# EAGLE board Quad_ESC_adapter (EAGLE 9.6.2)
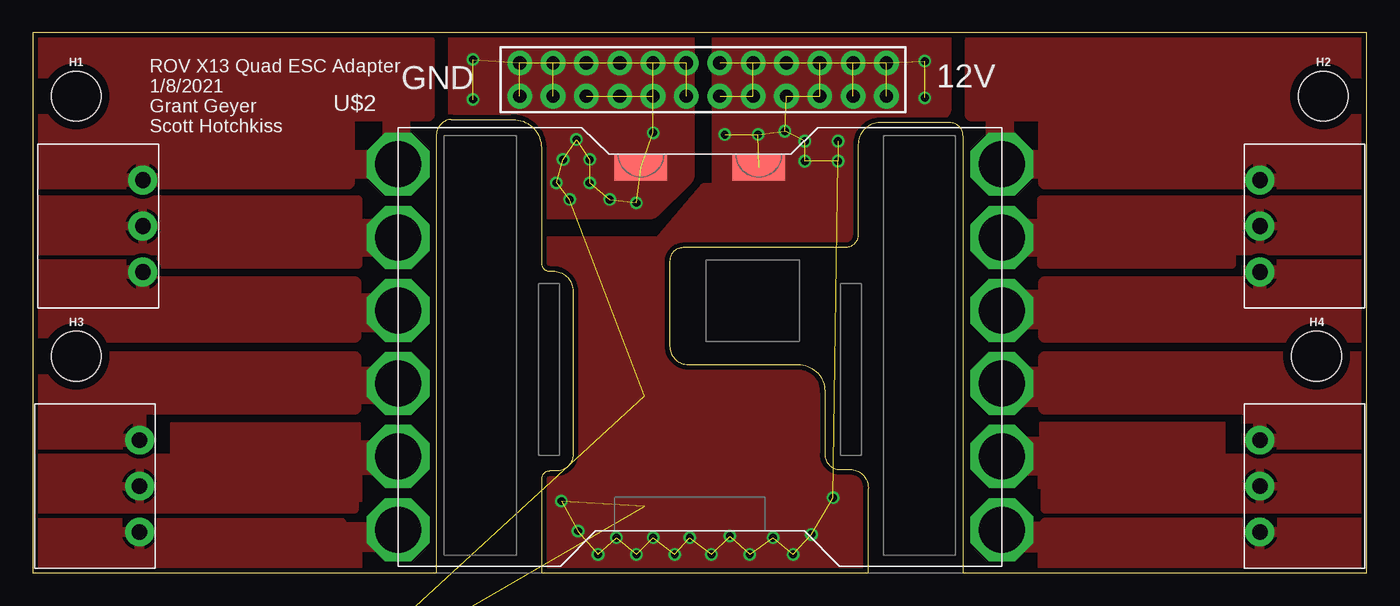
[diagram p0: board, top side]
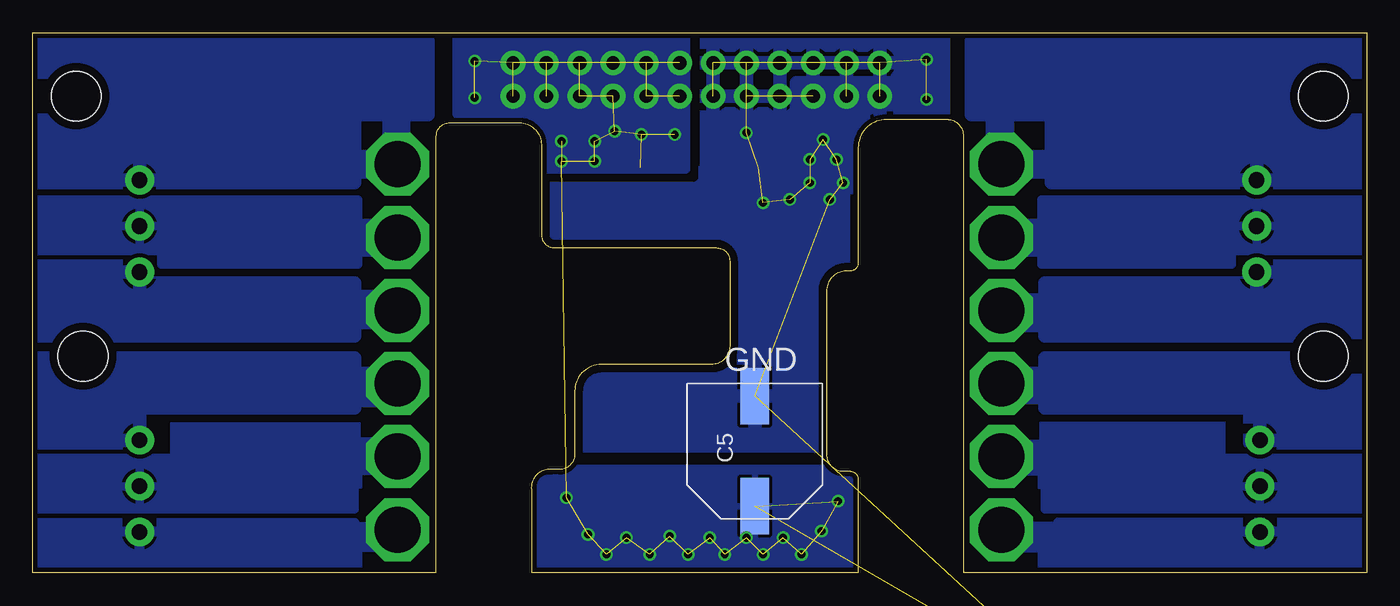
[diagram p1: board, bottom side, seen from below]

Size 101.6 x 41.15 mm. Coordinates in mm from the lower left corner, seen from the top.
Outline: 0,0 30.73,0 30.73,33.27 arc-90 31.88,34.54 36.58,34.54 arc-90 38.73,32.38 38.73,23.62 arc90 39.37,22.99 39.62,22.99 arc-90 41.15,21.46 41.15,9.02 arc-90 39.88,7.75 39.37,7.75 arc90 38.73,7.11 38.73,0 63.63,0 63.63,6.35 arc100 62.1,7.87 61.47,7.87 arc-90 60.33,9.02 60.33,13.84 arc90 58.29,15.88 49.91,15.88 arc-90 48.51,17.27 48.51,23.75 arc-90 49.53,24.77 61.85,24.77 arc90 62.87,25.78 62.87,32.64 arc-90 64.52,34.29 69.85,34.29 arc-90 70.87,33.27 70.87,0 101.6,0 101.6,41.15 0,41.15 0,0
Copper layers (1*16): Top 0.0356mm / dielectric 1.5011mm / Bottom 0.0356mm
Design rules "ECE_Senior_Design *": minimum track width 8mil, minimum drill 13mil, track to track 8mil, track to pad 8mil, pad to pad 6mil, via to via 8mil, smd to smd 6mil, copper to edge 15mil, drill to drill 8mil, minimum pad ring 7mil, minimum via ring 7mil, stop-mask expansion 3mil, vias tented up to drill 30mil, thermal gap 10mil

## Footprints (pad centres in the part's own frame; a part is rotated, then mirrored left to right if it is on the bottom)
CAPAE1030X1050N = smd 4.3 x 2.15: + -4.2,0; - 4.2,0
6-32-HOLE = hole 3.81: 0,0
284512-3 = drill 1.2 pad 2.2: 1 0,3.5; 2 0,0; 3 0,-3.5
BACKPLANE_ESC_ADAPTER_ESC_PWR = drill 1.016 pad 1.88: 12V@1 65.024,36.322; 12V@2 65.024,38.862; 12V@3 62.484,36.322; 12V@4 62.484,38.862; 12V@5 59.944,36.322; 12V@6 59.944,38.862; 12V@7 57.404,36.322; 12V@8 57.404,38.862; 12V@9 54.864,36.322; 12V@10 54.864,38.862; 12V@11 52.324,36.322; 12V@12 52.324,38.862; GND@1 49.784,38.862; GND@2 49.784,36.322; GND@3 47.244,38.862; GND@4 47.244,36.322; GND@5 44.704,38.862; GND@6 44.704,36.322; GND@7 42.164,38.862; GND@8 42.164,36.322; GND@9 39.624,38.862; GND@10 39.624,36.322; GND@11 37.084,38.862; GND@12 37.084,36.322
LUMENIER_QUAD-NO-CUT = drill 3.5 pad 4.8 octagon: 1 0,30.62; 2 0,25.05; 3 0,19.48; 4 0,13.92; 5 0,8.35; 6 0,2.78; 7 46,2.78; 8 46,8.35; 9 46,13.92; 10 46,19.48; 11 46,25.05; 12 46,30.62 | smd 4 x 2: GND 18.51,30.37; VIN 27.49,30.37

## Placement (x,y rotation side)
C1  330uF  [CAPAE1030X1050N]  3.3,-33.78 0 top  (outside the outline)
C5  330uF  [CAPAE1030X1050N]  46.61,9.27 90 bottom
C6  330uF  [CAPAE1030X1050N]  3.3,-22.48 0 top  (outside the outline)
H1  6-32-HOLE  [6-32-HOLE]  3.3,36.32 0 top
H2  6-32-HOLE  [6-32-HOLE]  98.3,36.32 0 top
H3  6-32-HOLE  [6-32-HOLE]  3.3,16.51 0 top
H4  6-32-HOLE  [6-32-HOLE]  97.79,16.51 0 top
J1  284512-3  [284512-3]  8.38,26.42 180 top
J2  284512-3  [284512-3]  8.13,6.6 180 top
J3  284512-3  [284512-3]  93.47,26.42 0 top
J4  284512-3  [284512-3]  93.47,6.6 0 top
U$2  BACKPLANE_ESC_ADAPTER_PWRESC  [BACKPLANE_ESC_ADAPTER_ESC_PWR]  0,0 0 top
U$10  LUMENIER_QUAD-NO-CUT  [LUMENIER_QUAD-NO-CUT]  27.81,0.51 0 top

## Library data of the parts
C1 C5 C6 = CAP, aluminin-capacitor-brick-UCM1H331MNL1GS; ARROW_PART_NUMBER: UCM1H331MNL1GS; ARROW_PRICE-STOCK: https://www.arrow.com/en/products/ucm1h331mnl1gs/nichicon; DESCRIPTION: Nichicon 330uF 50 V Aluminium Electrolytic Capacitor SMD, CM Series 2000h 10 (Dia.) x 10mm; HEIGHT: 10.5mm; MANUFACTURER_NAME: Nichicon; MANUFACTURER_PART_NUMBER: UCM1H331MNL1GS; MOUSER_PART_NUMBER: 647-UCM1H331MNL1GS; MOUSER_PRICE-STOCK: https://www.mouser.co.uk/ProductDetail/Nichicon/UCM1H331MNL1GS?qs=DSgADHjnLTkTovFLdbC%252BNg%3D%3D
H1-H4 = Mounting Holes
J1-J4 = ThrusterConnector
U$2 = Backplane_ESC_adapter
U$10 = Lumenier ESC

## Nets
12V: C1.+ C5.+ C6.+ U$2.12V@1 U$2.12V@2 U$2.12V@3 U$2.12V@4 U$2.12V@5 U$2.12V@6 U$2.12V@7 U$2.12V@8 U$2.12V@9 U$2.12V@10 U$2.12V@11 U$2.12V@12 U$10.VIN
ESC1_B: J1.3 U$10.1
ESC1_R: J1.1 U$10.3
ESC1_Y: J1.2 U$10.2
ESC2_B: J2.3 U$10.4
ESC2_R: J2.1 U$10.6
ESC2_Y: J2.2 U$10.5
ESC3_B: J3.1 U$10.12
ESC3_R: J3.3 U$10.10
ESC3_Y: J3.2 U$10.11
ESC4_B: J4.1 U$10.9
ESC4_R: J4.3 U$10.7
ESC4_Y: J4.2 U$10.8
GND: C1.- C5.- C6.- U$2.GND@1 U$2.GND@2 U$2.GND@3 U$2.GND@4 U$2.GND@5 U$2.GND@6 U$2.GND@7 U$2.GND@8 U$2.GND@9 U$2.GND@10 U$2.GND@11 U$2.GND@12 U$10.GND

## Tracks (layer width: path | path; a pad name or v marks a point on that pad's centre or on a via)
12V  (via drill 0.6)  (39 unrouted)
  other vias: 41.53,3.17 40.26,5.46 43.05,1.4 44.45,2.67 45.97,1.4 47.24,2.67 48.89,1.4 50.04,2.67 51.69,1.4 53.09,2.79 54.61,1.4 56.39,2.67 57.91,1.4 59.31,2.92 60.96,5.71 61.34,31.37 58.8,31.37 61.34,32.89 58.8,32.89 52.7,33.4 55.25,33.4 57.28,33.66 67.94,36.2 67.94,38.99
  pour Top (isolate 0.254, no thermals): 52.7,24.26 52.7,44.7 68.96,44.7 68.96,35.43 65.53,35.43 65.53,24.26
  pour Bottom (isolate 0.254): 38.86,8 63.75,8 63.75,-0.89 38.86,-0.89
  pour Bottom (isolate 0.254, no thermals): 51.82,42.93 69.34,42.93 69.34,34.97 66.11,30.73 51.82,30.73
  pour Top (isolate 0.254): 37.08,25.4 47.68,25.4 51.13,29.46 64.77,29.46 64.77,-5.08 37.08,-5.08
ESC1_B
  pour Bottom (no thermals): 24,32.13 27.56,32.13 27.56,30.1 24,30.1
  pour Bottom (isolate 0.305): -1.78,29.72 24,29.72 24,34.92 30.1,34.92 30.1,40.51 -1.78,40.51
  pour Bottom (no thermals): 26.92,32.26 26.92,35.81 28.96,35.81 28.96,32.26
  pour Top (isolate 0.305): -3.05,29.72 24,29.72 24,34.92 30.1,34.92 30.1,40.51 -3.05,40.51
  pour Top (no thermals): 27.3,32.13 23.75,32.13 23.75,30.1 27.3,30.1
  pour Top (no thermals): 28.7,32.26 28.7,35.81 26.67,35.81 26.67,32.26
ESC1_R
  pour Bottom (isolate 0.305): -0.76,18.03 24.51,18.03 24.51,22.1 8.89,22.1 8.89,23.37 -0.76,23.37
  pour Bottom (no thermals): 22.35,21.21 27.56,21.21 27.56,18.41 22.35,18.41
  pour Top (isolate 0.305): -1.52,18.03 24.51,18.03 24.51,22.1 8.13,22.1 8.13,23.37 -1.52,23.37
  pour Top (no thermals): 27.69,21.21 22.48,21.21 22.48,18.41 27.69,18.41
ESC1_Y
  pour Bottom (isolate 0.305): -0.76,28.45 24.77,28.45 24.77,23.5 10.29,23.5 10.29,24.51 -0.76,24.51
  pour Bottom (no thermals): 23.5,26.92 23.5,24.13 28.07,24.13 28.07,26.92
  pour Top (isolate 0.305): -1.27,28.45 24.77,28.45 24.77,23.5 9.78,23.5 9.78,24.51 -1.27,24.51
  pour Top (no thermals): 28.32,26.92 28.32,24.13 23.75,24.13 23.75,26.92
ESC2_B
  pour Bottom (isolate 0.305): 24.51,16.38 -2.29,16.38 -2.29,9.91 8.89,9.91 8.89,12.57 24.51,12.57
  pour Bottom (no thermals): 23.24,15.62 27.94,15.62 27.94,12.95 23.24,12.95
  pour Top (isolate 0.305): 24.51,16.38 -3.05,16.38 -3.05,9.91 8.13,9.91 8.13,12.57 24.51,12.57
  pour Top (no thermals): 27.81,15.62 23.11,15.62 23.11,12.95 27.81,12.95
ESC2_R
  pour Bottom (isolate 0.305): -0.76,3.81 23.5,3.81 23.5,-0.13 -0.76,-0.13
  pour Bottom (no thermals): 21.21,3.81 28.32,3.81 28.32,1.65 25.02,1.65 25.02,-0.13 21.21,-0.13
  pour Top (isolate 0.305): -1.52,3.81 23.5,3.81 23.5,-0.13 -1.52,-0.13
  pour Top (no thermals): 20.96,3.81 28.07,3.81 28.07,1.65 25.02,1.65 25.02,-0.13 20.96,-0.13
ESC2_Y
  pour Bottom (isolate 0.305): -0.51,8.76 24.51,8.76 24.51,4.83 -0.51,4.83
  pour Bottom (no thermals): 10.8,11.43 24.89,11.43 24.89,10.03 26.42,10.03 26.42,7.49 25.02,7.49 25.02,6.48 10.8,6.48
  pour Top (isolate 0.305): -1.27,8.76 24.51,8.76 24.51,4.83 -1.27,4.83
  pour Top (no thermals): 10.54,11.43 24.89,11.43 24.89,10.03 26.16,10.03 26.16,7.49 25.02,7.49 25.02,5.46 10.54,5.46
ESC3_B
  pour Bottom (isolate 0.305): 104.65,29.72 77.09,29.72 77.09,34.92 71.5,34.92 71.5,40.51 104.65,40.51
  pour Top (no thermals): 74.68,32.26 74.68,35.81 72.64,35.81 72.64,32.26
  pour Bottom (no thermals): 72.9,32.26 72.9,35.81 74.93,35.81 74.93,32.26
  pour Top (no thermals): 77.6,32.13 74.04,32.13 74.04,30.1 77.6,30.1
  pour Bottom (no thermals): 74.3,32.13 77.85,32.13 77.85,30.1 74.3,30.1
  pour Top (isolate 0.305): 103.38,29.72 77.09,29.72 77.09,34.92 71.5,34.92 71.5,40.51 103.38,40.51
ESC3_R
  pour Top (isolate 0.305): 102.36,18.03 77.09,18.03 77.09,22.1 92.71,22.1 92.71,23.37 102.36,23.37
  pour Top (no thermals): 79.25,21.46 74.04,21.46 74.04,18.67 79.25,18.67
  pour Bottom (isolate 0.305): 103.12,18.03 77.09,18.03 77.09,22.1 93.47,22.1 93.47,23.37 103.12,23.37
  pour Bottom (no thermals): 73.91,21.46 79.12,21.46 79.12,18.67 73.91,18.67
ESC3_Y
  pour Top (isolate 0.305): 102.36,28.45 76.84,28.45 76.84,23.5 91.31,23.5 91.31,24.51 102.36,24.51
  pour Top (no thermals): 78.11,26.92 78.11,24.13 73.53,24.13 73.53,26.92
  pour Bottom (isolate 0.305): 102.87,28.45 76.84,28.45 76.84,23.5 91.82,23.5 91.82,24.51 102.87,24.51
  pour Bottom (no thermals): 73.28,26.92 73.28,24.13 77.85,24.13 77.85,26.92
ESC4_B
  pour Top (isolate 0.305): 77.09,16.38 103.89,16.38 103.89,9.91 92.71,9.91 92.71,12.57 77.09,12.57
  pour Top (no thermals): 78.36,15.62 73.66,15.62 73.66,12.7 78.36,12.7
  pour Bottom (isolate 0.305): 77.09,16.38 104.65,16.38 104.65,9.91 93.47,9.91 93.47,12.57 77.09,12.57
  pour Bottom (no thermals): 73.79,15.62 78.49,15.62 78.49,12.7 73.79,12.7
ESC4_R
  pour Top (isolate 0.305): 102.36,3.81 77.09,3.81 77.09,-0.13 102.36,-0.13
  pour Top (no thermals): 80.39,3.81 73.28,3.81 73.28,1.65 76.58,1.65 76.58,-0.13 80.39,-0.13
  pour Bottom (isolate 0.305): 103.12,3.81 77.09,3.81 77.09,-0.13 103.12,-0.13
  pour Bottom (no thermals): 80.65,3.81 73.53,3.81 73.53,1.65 76.58,1.65 76.58,-0.13 80.65,-0.13
ESC4_Y
  pour Top (isolate 0.305): 102.11,8.76 77.09,8.76 77.09,4.83 102.11,4.83
  pour Top (no thermals): 90.81,11.43 76.71,11.43 76.71,10.29 75.18,10.29 75.18,7.49 76.58,7.49 76.58,6.48 90.81,6.48
  pour Bottom (isolate 0.305): 102.87,8.76 77.09,8.76 77.09,4.83 102.87,4.83
  pour Bottom (no thermals): 91.06,11.43 76.71,11.43 76.71,10.29 75.44,10.29 75.44,7.49 76.58,7.49 76.58,6.48 91.06,6.48
GND  (via drill 0.6)  (26 unrouted)
  other vias: 47.24,33.53 45.97,28.19 43.94,28.45 40.89,28.45 39.88,29.72 42.42,29.72 42.42,31.5 40.39,31.5 41.4,33.02 33.53,36.07 33.53,39.12
  pour Top (isolate 0.254, no thermals): 32.64,43.81 49.4,43.81 49.4,30.35 46.99,27.94 32.64,27.94
  pour Bottom: 32.26,42.67 50.29,42.67 50.29,29.34 32.26,29.34
  pour Bottom (isolate 0.61, rank 2): 37.34,30.48 61.98,30.48 61.98,9.65 37.34,9.65
  pour Bottom (isolate 0.61, no thermals): 35.05,33.53 35.05,37.34 43.43,37.34 43.43,33.53

## Text on the board
tNames: ROV X13 Quad ESC Adapter / 1/8/2021 / Grant Geyer / Scott Hotchkiss | GND | 12V
bNames: GND